# Altium PCB usbasp.PcbDoc (part 3 of 3)
Units mm, origin at the board's own origin, x right, y up, seen from the top; angles counter-clockwise.
Board outline 86.49 x 53.59 mm, 2 copper layers (Top Layer, Bottom Layer); 22 components, 22 nets, 89 pads, 22 vias.
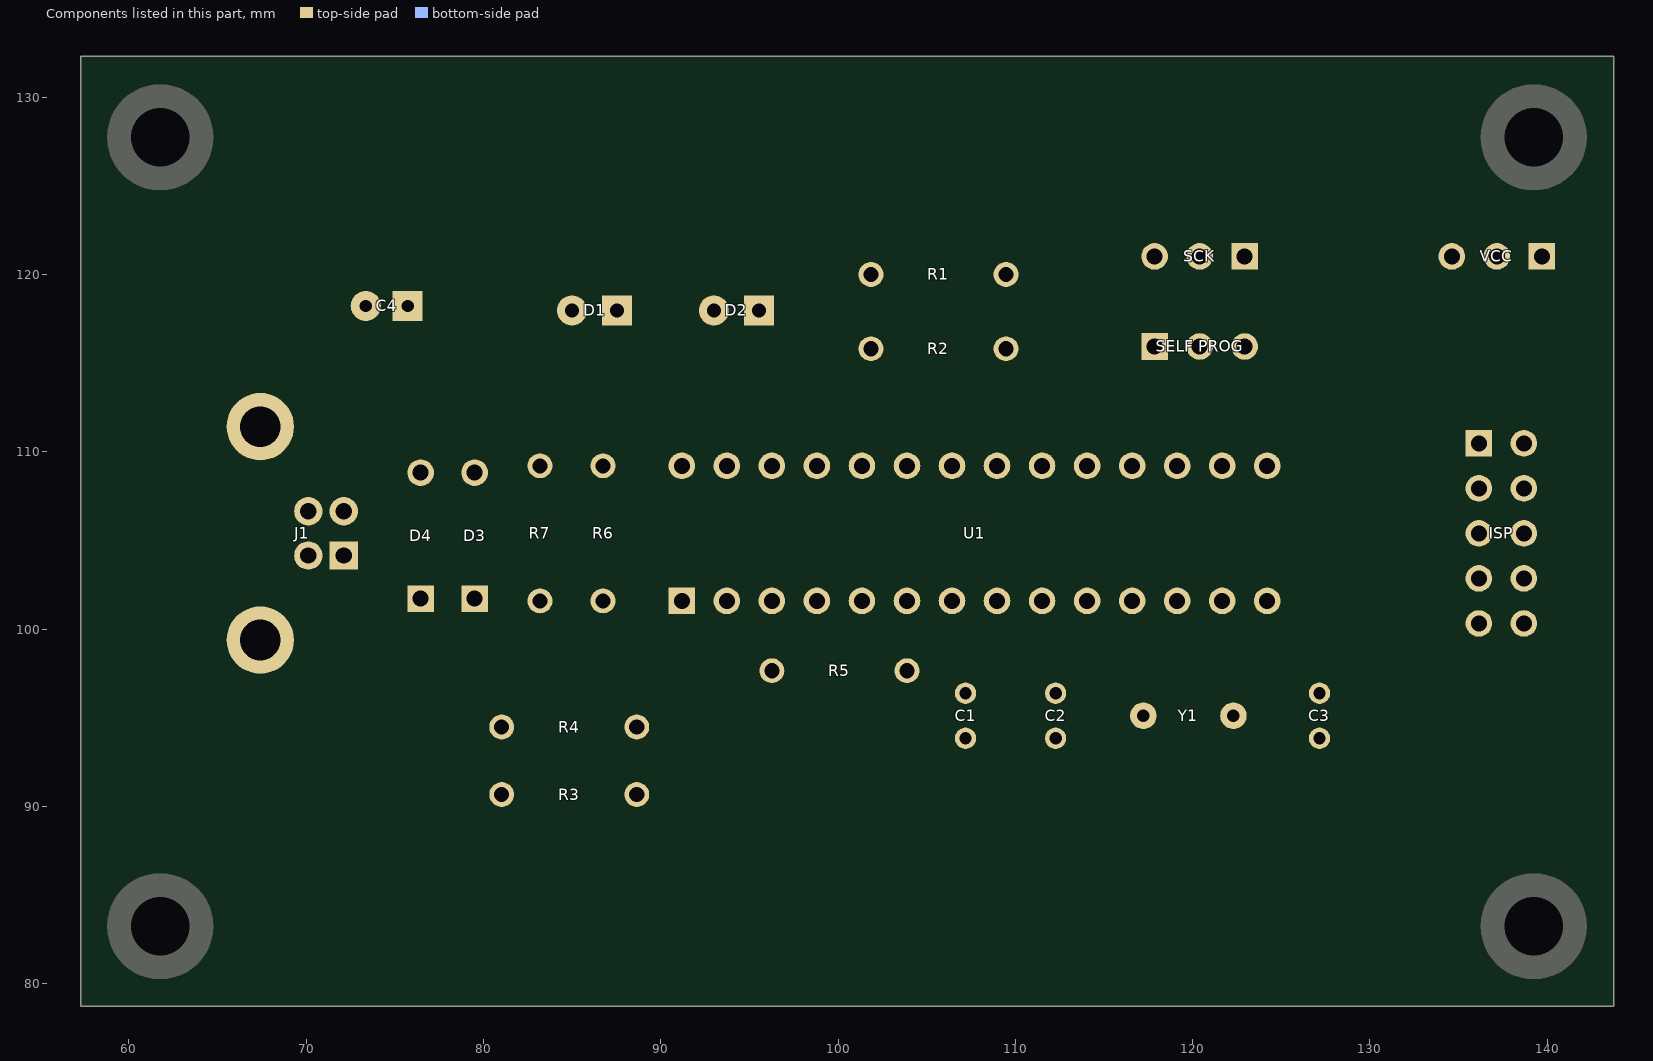
[diagram p3: the components of this part, seen from the top]

## Via types
v1: diameter 1.5, hole 0.711, Top Layer to Bottom Layer, tented top, 17 vias
v2: diameter 1.5, hole 0.711, Top Layer to Bottom Layer, 5 vias

## Nets (pads, with @x,y where several pads share a name; then routed paths per layer and width w, separated by ;. In a path a pad name is that pad's centre, name@x,y a point inside that pad or via, vN(x,y) a via of type N, cw(c..) or ccw(c..) an arc to the next point about the centre after c; other vN are vias at no path point) (continued)
copper on no net: (continued)
  Bottom Layer w0.01: 130.714,126.806 130.765,126.806 ; 130.724,121.07 131.126,121.07 ; 130.724,121.503 131.816,121.503 ; 130.724,121.513 131.826,121.513 ; 130.724,121.523 131.836,121.523 ; 130.724,121.533 131.836,121.533 ; 130.724,121.698 131.177,121.698 ; 130.724,121.709 131.177,121.709 ; 130.724,121.719 131.177,121.719 ; 130.724,124.067 131.867,124.067 ; 130.724,124.077 131.857,124.077 ; 130.724,124.623 131.27,124.623 ; 130.724,124.633 131.27,124.633 ; 130.734,121.544 131.846,121.544 ; 130.734,121.554 131.857,121.554 ; 130.734,121.564 131.857,121.564 ; 130.734,121.575 131.867,121.575 ; 130.734,121.585 131.877,121.585 ; 130.734,121.606 131.888,121.606 ; 130.734,121.626 131.898,121.626 ; 130.734,121.636 131.908,121.636 ; 130.734,121.647 131.908,121.647 ; 130.734,121.657 131.908,121.657 ; 130.734,121.667 131.919,121.667 ; 130.734,121.678 131.177,121.678 ; 130.734,121.688 131.177,121.688 ; 130.734,124.087 131.846,124.087 ; 130.734,124.098 131.836,124.098 ; 130.734,124.108 131.836,124.108 ; 130.734,124.602 131.27,124.602 ; 130.734,124.612 131.27,124.612 ; 130.745,121.595 131.877,121.595 ; 130.745,121.616 131.888,121.616 ; 130.745,124.118 131.826,124.118 ; 130.745,124.128 131.816,124.128 ; 130.745,124.139 131.805,124.139 ; 130.745,124.571 131.259,124.571 ; 130.745,124.582 131.27,124.582 ; 130.745,124.592 131.27,124.592 ; 130.755,124.149 131.795,124.149 ; 130.755,124.159 131.785,124.159 ; 130.755,124.17 131.774,124.17 ; 130.755,124.54 131.259,124.54 ; 130.755,124.551 131.259,124.551 ; 130.755,124.561 131.259,124.561 ; 130.765,122.429 130.775,122.429 ; 130.765,124.18 131.764,124.18 ; 130.765,124.19 131.754,124.19 ; 130.765,124.201 131.743,124.201 ; 130.765,124.211 131.733,124.211 ; 130.765,124.221 131.723,124.221 ; 130.765,124.479 131.239,124.479 ; 130.765,124.499 131.249,124.499 ; 130.765,124.509 131.249,124.509 ; 130.765,124.52 131.249,124.52 ; 130.765,124.53 131.249,124.53 ; 130.775,120.72 130.786,120.72 ; 130.775,124.231 131.702,124.231 ; 130.775,124.242 131.702,124.242 ; 130.775,124.252 131.682,124.252 ; 130.775,124.262 131.671,124.262 ; 130.775,124.273 131.651,124.273 ; 130.775,124.283 131.64,124.283 ; 130.775,124.304 131.61,124.304 ; 130.775,124.314 131.589,124.314 ; 130.775,124.355 131.517,124.355 ; 130.775,124.396 131.229,124.396 ; 130.775,124.417 131.218,124.417 ; 130.775,124.437 131.229,124.437 ; 130.775,124.448 131.229,124.448 ; 130.775,124.458 131.229,124.458 ; 130.775,124.468 131.239,124.468 ; 130.775,124.489 131.239,124.489 ; 130.775,126.806 130.971,126.806 ; 130.786,124.293 131.63,124.293 ; 130.786,124.324 131.579,124.324 ; 130.786,124.334 131.558,124.334 ; 130.786,124.345 131.537,124.345 ; 130.786,124.365 131.476,124.365 ; 130.786,124.376 131.445,124.376 ; 130.786,124.386 131.404,124.386 ; 130.786,124.407 131.218,124.407 ; 130.786,124.427 131.229,124.427 ; 130.806,121.06 130.827,121.06 ; 130.837,121.06 130.848,121.06 ; 130.858,120.72 130.868,120.72 ; 130.858,121.06 131.012,121.06 ; 130.868,123.995 130.878,123.995 ; 130.889,122.759 131.795,122.759 ; 130.899,120.72 130.909,120.72 ; 130.899,122.769 131.774,122.769 ; 130.899,122.779 131.764,122.779 ; 130.93,122.79 130.94,122.79 ; 130.951,120.72 130.961,120.72 ; 130.951,122.79 131.774,122.79 ; 130.981,126.806 131.053,126.806 ; 131.002,120.72 131.012,120.72 ; 131.023,121.06 131.043,121.06 ; 131.023,122.749 131.816,122.749 ; 131.023,123.995 131.033,123.995 ; 131.043,123.995 131.908,123.995 ; 131.053,121.06 131.064,121.06 ; 131.064,126.806 131.198,126.806 ; 131.074,122.8 131.785,122.8 ; 131.084,123.984 131.908,123.984 ; 131.105,122.738 131.836,122.738 ; 131.115,122.81 131.795,122.81 ; 131.126,123.974 131.919,123.974 ; 131.146,122.821 131.805,122.821 ; 131.156,122.728 131.857,122.728 ; 131.167,122.831 131.805,122.831 ; 131.167,123.964 131.929,123.964 ; 131.177,121.08 131.187,121.08 ; 131.187,123.953 131.929,123.953 ; 131.198,122.718 131.877,122.718 ; 131.198,122.841 131.826,122.841 ; 131.208,123.943 131.929,123.943 ; 131.208,126.806 131.373,126.806 ; 131.218,121.678 131.929,121.678 ; 131.218,122.707 131.888,122.707 ; 131.218,122.852 131.826,122.852 ; 131.229,122.862 131.836,122.862 ; 131.239,121.688 131.929,121.688 ; 131.239,122.697 131.908,122.697 ; 131.239,123.933 131.939,123.933 ; 131.239,124.396 131.249,124.396 ; 131.239,126.353 131.259,126.353 ; 131.249,121.698 131.939,121.698 ; 131.249,122.872 131.846,122.872 ; 131.249,123.923 131.939,123.923 ; 131.259,121.709 131.939,121.709 ; 131.259,122.687 131.919,122.687 ; 131.259,124.396 131.27,124.396 ; 131.27,121.719 131.949,121.719 ; 131.27,122.882 131.857,122.882 ; 131.27,123.912 131.949,123.912 ; 131.27,126.353 131.311,126.353 ; 131.28,122.676 131.929,122.676 ; 131.28,122.893 131.867,122.893 ; 131.28,123.902 131.949,123.902 ; 131.28,124.396 131.29,124.396 ; 131.29,121.729 131.949,121.729 ; 131.29,122.666 131.939,122.666 ; 131.29,122.903 131.877,122.903 ; 131.301,121.739 131.96,121.739 ; 131.301,122.656 131.949,122.656 ; 131.301,123.892 131.96,123.892 ; 131.311,121.75 131.96,121.75 ; 131.311,122.913 131.888,122.913 ; 131.311,123.881 131.96,123.881 ; 131.311,124.396 131.321,124.396 ; 131.321,121.76 131.97,121.76 ; 131.321,122.635 131.97,122.635 ; 131.321,122.646 131.96,122.646 ; 131.321,122.924 131.898,122.924 ; 131.321,126.353 131.342,126.353 ; 131.332,121.77 131.97,121.77 ; 131.332,122.625 131.98,122.625 ; 131.332,122.934 131.908,122.934 ; 131.332,123.871 131.96,123.871 ; 131.342,121.781 131.98,121.781 ; 131.342,122.944 131.908,122.944 ; 131.342,123.861 131.97,123.861 ; 131.352,121.791 131.98,121.791 ; 131.352,122.604 132.001,122.604 ; 131.352,122.615 131.991,122.615 ; 131.352,122.955 131.919,122.955 ; 131.352,123.85 131.97,123.85 ; 131.352,126.353 131.373,126.353 ; 131.362,120.72 131.373,120.72 ; 131.362,121.801 131.98,121.801 ; 131.362,122.965 131.929,122.965 ; 131.362,123.84 131.97,123.84 ; 131.373,121.811 131.991,121.811 ; 131.373,122.594 132.001,122.594 ; 131.373,122.975 131.929,122.975 ; 131.373,123.83 131.98,123.83 ; 131.383,121.822 131.991,121.822 ; 131.383,121.832 132.001,121.832 ; 131.383,122.584 132.011,122.584 ; 131.383,122.985 131.939,122.985 ; 131.383,123.82 131.98,123.82 ; 131.383,126.353 131.393,126.353 ; 131.383,126.806 131.424,126.806 ; 131.393,120.72 131.404,120.72 ; 131.393,121.842 132.001,121.842 ; 131.393,122.574 132.011,122.574 ; 131.393,122.996 131.949,122.996 ; 131.393,123.006 131.949,123.006 ; 131.393,123.809 131.991,123.809 ; 131.404,121.853 132.011,121.853 ; 131.404,122.563 132.021,122.563 ; 131.404,123.016 131.96,123.016 ; 131.404,123.799 131.991,123.799 ; 131.404,126.353 131.424,126.353 ; 131.414,121.863 132.011,121.863 ; 131.414,122.553 132.032,122.553 ; 131.414,123.027 131.96,123.027 ; 131.414,123.778 131.991,123.778 ; 131.414,123.789 131.991,123.789 ; 131.424,121.873 132.011,121.873 ; 131.424,121.884 132.021,121.884 ; 131.424,122.543 132.032,122.543 ; 131.424,123.037 131.97,123.037 ; 131.424,123.047 131.97,123.047 ; 131.424,123.768 131.991,123.768 ; 131.435,122.532 132.032,122.532 ; 131.435,123.058 131.98,123.058 ; 131.435,123.068 131.98,123.068 ; 131.435,123.758 132.001,123.758 ; 131.435,126.353 131.445,126.353 ; 131.435,126.806 131.589,126.806 ; 131.445,121.894 132.021,121.894 ; 131.445,121.904 132.021,121.904 ; 131.445,122.522 132.042,122.522 ; 131.445,123.078 131.98,123.078 ; 131.445,123.737 132.001,123.737 ; 131.445,123.747 132.001,123.747 ; 131.455,120.72 131.465,120.72 ; 131.455,121.914 132.032,121.914 ; 131.455,122.512 132.042,122.512 ; 131.455,123.088 131.991,123.088 ; 131.455,123.099 131.991,123.099 ; 131.455,123.727 132.011,123.727 ; 131.455,124.376 131.465,124.376 ; 131.455,126.353 131.476,126.353 ; 131.465,121.925 132.032,121.925 ; 131.465,121.935 132.042,121.935 ; 131.465,122.501 132.052,122.501 ; 131.465,123.109 131.991,123.109 ; 131.465,123.119 132.001,123.119 ; 131.465,123.696 132.011,123.696 ; 131.465,123.706 132.011,123.706 ; 131.465,123.717 132.011,123.717 ; 131.476,121.945 132.042,121.945 ; 131.476,121.956 132.042,121.956 ; 131.476,122.491 132.052,122.491 ; 131.476,123.13 132.001,123.13 ; 131.476,123.14 132.001,123.14 ; 131.476,123.686 132.011,123.686 ; 131.486,121.966 132.052,121.966 ; 131.486,121.976 132.052,121.976 ; 131.486,122.471 132.052,122.471 ; 131.486,122.481 132.052,122.481 ; 131.486,123.15 132.011,123.15 ; 131.486,123.16 132.011,123.16 ; 131.486,123.171 132.011,123.171 ; 131.486,123.665 132.011,123.665 ; 131.486,123.675 132.021,123.675 ; 131.486,124.365 131.496,124.365 ; 131.486,126.353 131.517,126.353 ; 131.496,120.72 131.507,120.72 ; 131.496,121.987 132.052,121.987 ; 131.496,121.997 132.063,121.997 ; 131.496,122.46 132.063,122.46 ; 131.496,123.181 132.011,123.181 ; 131.496,123.191 132.021,123.191 ; 131.496,123.634 132.021,123.634 ; 131.496,123.644 132.021,123.644 ; 131.496,123.655 132.021,123.655 ; 131.507,122.007 132.063,122.007 ; 131.507,122.017 132.063,122.017 ; 131.507,122.44 132.063,122.44 ; 131.507,122.45 132.063,122.45 ; 131.507,123.202 132.021,123.202 ; 131.507,123.212 132.032,123.212 ; 131.507,123.222 132.021,123.222 ; 131.507,123.233 132.032,123.233 ; 131.507,123.603 132.032,123.603 ; 131.507,123.614 132.021,123.614 ; 131.507,123.624 132.032,123.624 ; 131.517,122.028 132.063,122.028 ; 131.517,122.038 132.073,122.038 ; 131.517,122.429 132.063,122.429 ; 131.517,123.243 132.032,123.243 ; 131.517,123.253 132.032,123.253 ; 131.517,123.263 132.032,123.263 ; 131.517,123.274 132.032,123.274 ; 131.517,123.562 132.032,123.562 ; 131.517,123.572 132.032,123.572 ; 131.517,123.583 132.032,123.583 ; 131.517,123.593 132.032,123.593 ; 131.527,122.048 132.073,122.048 ; 131.527,122.059 132.073,122.059 ; 131.527,122.069 132.083,122.069 ; 131.527,122.079 132.083,122.079 ; 131.527,122.409 132.073,122.409 ; 131.527,122.419 132.073,122.419 ; 131.527,123.284 132.042,123.284 ; 131.527,123.294 132.032,123.294 ; 131.527,123.305 132.042,123.305 ; 131.527,123.315 132.042,123.315 ; 131.527,123.325 132.042,123.325 ; 131.527,123.336 132.042,123.336 ; 131.527,123.48 132.042,123.48 ; 131.527,123.5 132.042,123.5 ; 131.527,123.521 132.042,123.521 ; 131.527,123.531 132.042,123.531 ; 131.527,123.542 132.032,123.542 ; 131.527,123.552 132.032,123.552 ; 131.527,126.353 131.537,126.353 ; 131.537,122.09 132.083,122.09 ; 131.537,122.1 132.083,122.1 ; 131.537,122.11 132.083,122.11 ; 131.537,122.12 132.094,122.12 ; 131.537,122.388 132.073,122.388 ; 131.537,122.398 132.073,122.398 ; 131.537,123.346 132.042,123.346 ; 131.537,123.356 132.042,123.356 ; 131.537,123.366 132.042,123.366 ; 131.537,123.377 132.042,123.377 ; 131.537,123.387 132.042,123.387 ; 131.537,123.397 132.042,123.397 ; 131.537,123.408 132.042,123.408 ; 131.537,123.418 132.042,123.418 ; 131.537,123.428 132.042,123.428 ; 131.537,123.439 132.042,123.439 ; 131.537,123.449 132.042,123.449 ; 131.537,123.459 132.042,123.459 ; 131.537,123.469 132.042,123.469 ; 131.537,123.49 132.042,123.49 ; 131.537,123.511 132.032,123.511 ; 131.548,122.131 132.083,122.131 ; 131.548,122.141 132.094,122.141 ; 131.548,122.151 132.094,122.151 ; 131.548,122.172 132.094,122.172 ; 131.548,122.347 132.083,122.347 ; 131.548,122.357 132.083,122.357 ; 131.548,122.368 132.083,122.368 ; 131.548,122.378 132.073,122.378 ; 131.548,126.353 131.568,126.353 ; 131.558,120.72 131.568,120.72 ; 131.558,122.162 132.094,122.162 ; 131.558,122.182 132.083,122.182 ; 131.558,122.193 132.094,122.193 ; 131.558,122.203 132.094,122.203 ; 131.558,122.213 132.094,122.213 ; 131.558,122.223 132.083,122.223 ; 131.558,122.234 132.094,122.234 ; 131.558,122.244 132.094,122.244 ; 131.558,122.254 132.094,122.254 ; 131.558,122.275 132.094,122.275 ; 131.558,122.285 132.083,122.285 ; 131.558,122.295 132.094,122.295 ; 131.558,122.306 132.083,122.306 ; 131.558,122.316 132.083,122.316 ; 131.558,122.326 132.083,122.326 ; 131.558,122.337 132.083,122.337 ; 131.568,122.265 132.094,122.265 ; 131.579,126.353 131.61,126.353 ; 131.599,120.72 131.61,120.72 ; 131.599,126.806 131.877,126.806 ; 131.62,126.353 131.64,126.353 ; 131.64,120.72 131.651,120.72 ; 131.651,126.353 131.661,126.353 ; 131.671,120.72 131.682,120.72 ; 131.682,126.353 131.692,126.353 ; 131.702,126.353 131.713,126.353 ; 131.723,126.353 131.733,126.353 ; 131.733,120.72 131.743,120.72 ; 131.743,126.353 131.754,126.353 ; 131.764,120.72 131.774,120.72 ; 131.764,126.353 131.774,126.353 ; 131.795,120.72 131.805,120.72 ; 131.795,126.353 131.805,126.353 ; 131.826,126.353 131.836,126.353 ; 131.857,126.353 131.867,126.353 ; 131.888,126.353 131.898,126.353 ; 131.888,126.806 131.96,126.806 ; 131.919,126.353 131.929,126.353 ; 131.949,126.353 131.96,126.353 ; 131.97,126.806 132.351,126.806 ; 131.98,126.353 131.991,126.353 ; 132.001,126.353 132.021,126.353 ; 132.032,126.353 132.073,126.353 ; 132.083,126.353 132.124,126.353 ; 132.135,126.353 132.166,126.353 ; 132.176,126.353 132.186,126.353 ; 132.197,126.353 132.217,126.353 ; 132.227,126.353 132.856,126.353 ; 132.31,120.72 132.32,120.72 ; 132.341,120.72 132.361,120.72 ; 132.361,126.806 132.526,126.806 ; 132.372,120.72 132.856,120.72 ; 132.372,120.73 132.856,120.73 ; 132.372,120.741 132.845,120.741 ; 132.372,120.751 132.856,120.751 ; 132.372,120.761 132.856,120.761 ; 132.372,120.771 132.856,120.771 ; 132.372,120.782 132.856,120.782 ; 132.372,120.792 132.856,120.792 ; 132.372,120.802 132.856,120.802 ; 132.372,120.813 132.845,120.813 ; 132.372,120.823 132.856,120.823 ; 132.372,120.833 132.856,120.833 ; 132.372,120.844 132.856,120.844 ; 132.372,120.854 132.856,120.854 ; 132.372,120.864 132.856,120.864 ; 132.372,120.874 132.856,120.874 ; 132.372,120.885 132.856,120.885 ; 132.372,120.895 132.856,120.895 ; 132.372,120.905 132.845,120.905 ; 132.372,120.916 132.856,120.916 ; 132.372,120.926 132.856,120.926 ; 132.372,120.936 132.856,120.936 ; 132.372,120.946 132.856,120.946 ; 132.372,120.957 132.856,120.957 ; 132.372,120.967 132.856,120.967 ; 132.372,120.977 132.845,120.977 ; 132.372,120.988 132.856,120.988 ; 132.372,120.998 132.856,120.998 ; 132.372,121.008 132.856,121.008 ; 132.372,121.019 132.856,121.019 ; 132.372,121.029 132.856,121.029 ; 132.372,121.039 132.856,121.039 ; 132.372,121.049 132.856,121.049 ; 132.372,121.06 132.845,121.06 ; 132.372,121.07 132.856,121.07 ; 132.372,121.08 132.856,121.08 ; 132.372,121.091 132.856,121.091 ; 132.372,121.101 132.856,121.101 ; 132.372,121.111 132.856,121.111 ; 132.372,121.122 132.856,121.122 ; 132.372,121.132 132.856,121.132 ; 132.372,121.142 132.845,121.142 ; 132.372,121.152 132.856,121.152 ; 132.372,121.163 132.856,121.163 ; 132.372,121.173 132.856,121.173 ; 132.372,121.183 132.856,121.183 ; 132.372,121.194 132.856,121.194 ; 132.372,121.204 132.856,121.204 ; 132.372,121.214 132.856,121.214 ; 132.372,121.225 132.856,121.225 ; 132.372,121.235 132.845,121.235 ; 132.372,121.245 132.856,121.245 ; 132.372,121.255 132.856,121.255 ; 132.372,121.266 132.856,121.266 ; 132.372,121.276 132.856,121.276 ; 132.372,121.286 132.856,121.286 ; 132.372,121.297 132.856,121.297 ; 132.372,121.307 132.845,121.307 ; 132.372,121.317 132.856,121.317 ; 132.372,121.327 132.856,121.327 ; 132.372,121.338 132.856,121.338 ; 132.372,121.348 132.856,121.348 ; 132.372,121.358 132.856,121.358 ; 132.372,121.369 132.856,121.369 ; 132.372,121.379 132.856,121.379 ; 132.372,121.389 132.856,121.389 ; 132.372,121.4 132.845,121.4 ; 132.372,121.41 132.856,121.41 ; 132.372,121.42 132.856,121.42 ; 132.372,121.43 132.856,121.43 ; 132.372,121.441 132.856,121.441 ; 132.372,121.451 132.856,121.451 ; 132.372,121.461 132.856,121.461 ; 132.372,121.472 132.856,121.472 ; 132.372,121.482 132.856,121.482 ; 132.372,121.492 132.856,121.492 ; 132.372,121.503 132.856,121.503 ; 132.372,121.513 132.856,121.513 ; 132.372,121.523 132.856,121.523 ; 132.372,121.533 132.845,121.533 ; 132.372,121.544 132.856,121.544 ; 132.372,121.554 132.856,121.554 ; 132.372,121.564 132.856,121.564 ; 132.372,121.575 132.856,121.575 ; 132.372,121.585 132.856,121.585 ; 132.372,121.595 132.856,121.595 ; 132.372,121.606 132.856,121.606 ; 132.372,121.616 132.856,121.616 ; 132.372,121.626 132.856,121.626 ; 132.372,121.636 132.856,121.636 ; 132.372,121.647 132.856,121.647 ; 132.372,121.657 132.856,121.657 ; 132.372,121.667 132.856,121.667 ; 132.372,121.678 132.845,121.678 ; 132.372,121.688 132.856,121.688 ; 132.372,121.698 132.856,121.698 ; 132.372,121.709 132.856,121.709 ; 132.372,121.719 132.856,121.719 ; 132.372,121.729 132.856,121.729 ; 132.372,121.739 132.856,121.739 ; 132.372,121.75 132.856,121.75 ; 132.372,121.76 132.856,121.76 ; 132.372,121.77 132.856,121.77 ; 132.372,121.781 132.845,121.781 ; 132.372,121.791 132.856,121.791 ; 132.372,121.801 132.856,121.801 ; 132.372,121.811 132.856,121.811 ; 132.372,121.822 132.856,121.822 ; 132.372,121.832 132.856,121.832 ; 132.372,121.842 132.856,121.842 ; 132.372,121.853 132.856,121.853 ; 132.372,121.863 132.856,121.863 ; 132.372,121.873 132.856,121.873 ; 132.372,121.884 132.845,121.884 ; 132.372,121.894 132.856,121.894 ; 132.372,121.904 132.856,121.904 ; 132.372,121.914 132.856,121.914 ; 132.372,121.925 132.856,121.925 ; 132.372,121.935 132.856,121.935 ; 132.372,121.945 132.856,121.945 ; 132.372,121.956 132.856,121.956 ; 132.372,121.966 132.856,121.966 ; 132.372,121.976 132.856,121.976 ; 132.372,121.987 132.845,121.987 ; 132.372,121.997 132.856,121.997 ; 132.372,122.007 132.856,122.007 ; 132.372,122.017 132.856,122.017 ; 132.372,122.028 132.856,122.028 ; 132.372,122.038 132.856,122.038 ; 132.372,122.048 132.856,122.048 ; 132.372,122.059 132.856,122.059 ; 132.372,122.069 132.856,122.069 ; 132.372,122.079 132.856,122.079 ; 132.372,122.09 132.856,122.09 ; 132.372,122.1 132.845,122.1 ; 132.372,122.11 132.856,122.11 ; 132.372,122.12 132.856,122.12 ; 132.372,122.131 132.856,122.131 ; 132.372,122.141 132.856,122.141 ; 132.372,122.151 132.856,122.151 ; 132.372,122.162 132.856,122.162 ; 132.372,122.172 132.856,122.172 ; 132.372,122.182 132.845,122.182 ; 132.372,122.193 132.856,122.193 ; 132.372,122.203 132.856,122.203 ; 132.372,122.213 132.856,122.213 ; 132.372,122.223 132.856,122.223 ; 132.372,122.234 132.856,122.234 ; 132.372,122.244 132.856,122.244 ; 132.372,122.254 132.856,122.254 ; 132.372,122.265 132.856,122.265 ; 132.372,122.275 132.856,122.275 ; 132.372,122.285 132.856,122.285 ; 132.372,122.295 132.845,122.295 ; 132.372,122.306 132.856,122.306 ; 132.372,122.316 132.856,122.316 ; 132.372,122.326 132.856,122.326 ; 132.372,122.337 132.845,122.337 ; 132.372,122.347 132.856,122.347 ; 132.372,122.357 132.856,122.357 ; 132.372,122.368 132.856,122.368 ; 132.372,122.378 132.856,122.378 ; 132.372,122.388 132.856,122.388 ; 132.372,122.398 132.856,122.398 ; 132.372,122.409 132.856,122.409 ; 132.372,122.419 132.856,122.419 ; 132.372,122.429 132.856,122.429 ; 132.372,122.44 132.856,122.44 ; 132.372,122.45 132.856,122.45 ; 132.372,122.46 132.856,122.46 ; 132.372,122.471 132.845,122.471 ; 132.372,122.481 132.856,122.481 ; 132.372,122.491 132.856,122.491 ; 132.372,122.501 132.856,122.501 ; 132.372,122.512 132.856,122.512 ; 132.372,122.522 132.856,122.522 ; 132.372,122.532 132.856,122.532 ; 132.372,122.543 132.856,122.543 ; 132.372,122.553 132.845,122.553 ; 132.372,122.563 132.856,122.563 ; 132.372,122.574 132.856,122.574 ; 132.372,122.584 132.856,122.584 ; 132.372,122.594 132.856,122.594 ; 132.372,122.604 132.856,122.604 ; 132.372,122.615 132.856,122.615 ; 132.372,122.625 132.856,122.625 ; 132.372,122.635 132.856,122.635 ; 132.372,122.646 132.856,122.646 ; 132.372,122.656 132.856,122.656 ; 132.372,122.666 132.856,122.666 ; 132.372,122.676 132.845,122.676 ; 132.372,122.687 132.856,122.687 ; 132.372,122.697 132.856,122.697 ; 132.372,122.707 132.856,122.707 ; 132.372,122.718 132.856,122.718 ; 132.372,122.728 132.856,122.728 ; 132.372,122.738 132.856,122.738 ; 132.372,122.749 132.856,122.749 ; 132.372,122.759 132.856,122.759 ; 132.372,122.769 132.856,122.769 ; 132.372,122.779 132.856,122.779 ; 132.372,122.79 132.856,122.79 ; 132.372,122.8 132.856,122.8 ; 132.372,122.81 132.856,122.81 ; 132.372,122.821 132.856,122.821 ; 132.372,122.831 132.856,122.831 ; 132.372,122.841 132.845,122.841 ; 132.372,122.852 132.856,122.852 ; 132.372,122.862 132.856,122.862 ; 132.372,122.872 132.856,122.872 ; 132.372,122.882 132.856,122.882 ; 132.372,122.893 132.856,122.893 ; 132.372,122.903 132.856,122.903 ; 132.372,122.913 132.845,122.913 ; 132.372,122.924 132.856,122.924 ; 132.372,122.934 132.856,122.934 ; 132.372,122.944 132.856,122.944 ; 132.372,122.955 132.856,122.955 ; 132.372,122.965 132.856,122.965 ; 132.372,122.975 132.856,122.975 ; 132.372,122.985 132.856,122.985 ; 132.372,122.996 132.856,122.996 ; 132.372,123.006 132.845,123.006 ; 132.372,123.016 132.856,123.016 ; 132.372,123.027 132.856,123.027 ; 132.372,123.037 132.856,123.037 ; 132.372,123.047 132.856,123.047 ; 132.372,123.058 132.856,123.058 ; 132.372,123.068 132.856,123.068 ; 132.372,123.078 132.856,123.078 ; 132.372,123.088 132.845,123.088 ; 132.372,123.099 132.856,123.099 ; 132.372,123.109 132.856,123.109 ; 132.372,123.119 132.856,123.119 ; 132.372,123.13 132.856,123.13 ; 132.372,123.14 132.856,123.14 ; 132.372,123.15 132.856,123.15 ; 132.372,123.16 132.856,123.16 ; 132.372,123.171 132.845,123.171 ; 132.372,123.181 132.856,123.181 ; 132.372,123.191 132.856,123.191 ; 132.372,123.202 132.856,123.202 ; 132.372,123.212 132.856,123.212 ; 132.372,123.222 132.856,123.222 ; 132.372,123.233 132.856,123.233 ; 132.372,123.243 132.856,123.243 ; 132.372,123.253 132.856,123.253 ; 132.372,123.263 132.856,123.263 ; 132.372,123.274 132.856,123.274 ; 132.372,123.284 132.856,123.284 ; 132.372,123.294 132.845,123.294 ; 132.372,123.305 132.856,123.305 ; 132.372,123.315 132.856,123.315 ; 132.372,123.325 132.856,123.325 ; 132.372,123.336 132.856,123.336 ; 132.372,123.346 132.856,123.346 ; 132.372,123.356 132.856,123.356 ; 132.372,123.366 132.856,123.366 ; 132.372,123.377 132.845,123.377 ; 132.372,123.387 132.856,123.387 ; 132.372,123.397 132.856,123.397 ; 132.372,123.408 132.856,123.408 ; 132.372,123.418 132.856,123.418 ; 132.372,123.428 132.856,123.428 ; 132.372,123.439 132.856,123.439 ; 132.372,123.449 132.856,123.449 ; 132.372,123.459 132.845,123.459 ; 132.372,123.469 132.856,123.469 ; 132.372,123.48 132.856,123.48 ; 132.372,123.49 132.856,123.49 ; 132.372,123.5 132.856,123.5 ; 132.372,123.511 132.856,123.511 ; 132.372,123.521 132.856,123.521 ; 132.372,123.531 132.856,123.531 ; 132.372,123.542 132.845,123.542 ; 132.372,123.552 132.856,123.552 ; 132.372,123.562 132.856,123.562 ; 132.372,123.572 132.856,123.572 ; 132.372,123.583 132.856,123.583 ; 132.372,123.593 132.856,123.593 ; 132.372,123.603 132.856,123.603 ; 132.372,123.614 132.856,123.614 ; 132.372,123.624 132.856,123.624 ; 132.372,123.634 132.856,123.634 ; 132.372,123.644 132.856,123.644 ; 132.372,123.655 132.856,123.655 ; 132.372,123.665 132.856,123.665 ; 132.372,123.675 132.856,123.675 ; 132.372,123.686 132.856,123.686 ; 132.372,123.696 132.856,123.696 ; 132.372,123.706 132.845,123.706 ; 132.372,123.717 132.856,123.717 ; 132.372,123.727 132.856,123.727 ; 132.372,123.737 132.856,123.737 ; 132.372,123.747 132.856,123.747 ; 132.372,123.758 132.856,123.758 ; 132.372,123.768 132.856,123.768 ; 132.372,123.778 132.856,123.778 ; 132.372,123.789 132.845,123.789 ; 132.372,123.799 132.856,123.799 ; 132.372,123.809 132.856,123.809 ; 132.372,123.82 132.856,123.82 ; 132.372,123.83 132.856,123.83 ; 132.372,123.84 132.856,123.84 ; 132.372,123.85 132.856,123.85 ; 132.372,123.861 132.856,123.861 ; 132.372,123.871 132.845,123.871 ; 132.372,123.881 132.856,123.881 ; 132.372,123.892 132.856,123.892 ; 132.372,123.902 132.856,123.902 ; 132.372,123.912 132.856,123.912 ; 132.372,123.923 132.856,123.923 ; 132.372,123.933 132.856,123.933 ; 132.372,123.943 132.856,123.943 ; 132.372,123.953 132.845,123.953 ; 132.372,123.964 132.856,123.964 ; 132.372,123.974 132.856,123.974 ; 132.372,123.984 132.856,123.984 ; 132.372,123.995 132.856,123.995 ; 132.372,124.005 132.856,124.005 ; 132.372,124.015 132.856,124.015 ; 132.372,124.025 132.856,124.025 ; 132.372,124.036 132.856,124.036 ; 132.372,124.046 132.856,124.046 ; 132.372,124.056 132.856,124.056 ; 132.372,124.067 132.856,124.067 ; 132.372,124.077 132.845,124.077 ; 132.372,124.087 132.856,124.087 ; 132.372,124.098 132.856,124.098 ; 132.372,124.108 132.856,124.108 ; 132.372,124.118 132.856,124.118 ; 132.372,124.128 132.856,124.128 ; 132.372,124.139 132.856,124.139 ; 132.372,124.149 132.856,124.149 ; 132.372,124.159 132.856,124.159 ; 132.372,124.17 132.856,124.17 ; 132.372,124.18 132.856,124.18 ; 132.372,124.19 132.856,124.19 ; 132.372,124.201 132.845,124.201 ; 132.372,124.211 132.856,124.211 ; 132.372,124.221 132.856,124.221 ; 132.372,124.231 132.856,124.231 ; 132.372,124.242 132.856,124.242 ; 132.372,124.252 132.856,124.252 ; 132.372,124.262 132.856,124.262 ; 132.372,124.273 132.845,124.273 ; 132.372,124.283 132.856,124.283 ; 132.372,124.293 132.856,124.293 ; 132.372,124.304 132.856,124.304 ; 132.372,124.314 132.845,124.314 ; 132.372,124.324 132.856,124.324 ; 132.372,124.334 132.856,124.334 ; 132.372,124.345 132.856,124.345 ; 132.372,124.355 132.856,124.355 ; 132.372,124.365 132.856,124.365 ; 132.372,124.376 132.856,124.376 ; 132.372,124.386 132.856,124.386 ; 132.372,124.396 132.845,124.396 ; 132.372,124.407 132.856,124.407 ; 132.372,124.417 132.856,124.417 ; 132.372,124.427 132.856,124.427 ; 132.372,124.437 132.856,124.437 ; 132.372,124.448 132.845,124.448 ; 132.372,124.458 132.856,124.458 ; 132.372,124.468 132.856,124.468 ; 132.372,124.479 132.856,124.479 ; 132.372,124.489 132.856,124.489 ; 132.372,124.499 132.856,124.499 ; 132.372,124.509 132.856,124.509 ; 132.372,124.52 132.856,124.52 ; 132.372,124.53 132.856,124.53 ; 132.372,124.54 132.845,124.54 ; 132.372,124.551 132.856,124.551 ; 132.372,124.561 132.856,124.561 ; 132.372,124.571 132.856,124.571 ; 132.372,124.582 132.856,124.582 ; 132.372,124.592 132.856,124.592 ; 132.372,124.602 132.856,124.602 ; 132.372,124.612 132.845,124.612 ; 132.372,124.623 132.856,124.623 ; 132.372,124.633 132.856,124.633 ; 132.372,124.643 132.856,124.643 ; 132.372,124.654 132.856,124.654 ; 132.372,124.664 132.856,124.664 ; 132.372,124.674 132.856,124.674 ; 132.372,124.685 132.856,124.685 ; 132.372,124.695 132.845,124.695 ; 132.372,124.705 132.856,124.705 ; 132.372,124.715 132.856,124.715 ; 132.372,124.726 132.856,124.726 ; 132.372,124.736 132.856,124.736 ; 132.372,124.746 132.856,124.746 ; 132.372,124.757 132.856,124.757 ; 132.372,124.767 132.856,124.767 ; 132.372,124.777 132.845,124.777 ; 132.372,124.788 132.856,124.788 ; 132.372,124.798 132.856,124.798 ; 132.372,124.808 132.856,124.808 ; 132.372,124.818 132.845,124.818 ; 132.372,124.829 132.856,124.829 ; 132.372,124.839 132.856,124.839 ; 132.372,124.849 132.856,124.849 ; 132.372,124.86 132.856,124.86 ; 132.372,124.87 132.856,124.87 ; 132.372,124.88 132.856,124.88 ; 132.372,124.89 132.856,124.89 ; 132.372,124.901 132.845,124.901 ; 132.372,124.911 132.856,124.911 ; 132.372,124.921 132.856,124.921 ; 132.372,124.932 132.856,124.932 ; 132.372,124.942 132.856,124.942 ; 132.372,124.952 132.856,124.952 ; 132.372,124.963 132.856,124.963 ; 132.372,124.973 132.845,124.973 ; 132.372,124.983 132.856,124.983 ; 132.372,124.993 132.856,124.993 ; 132.372,125.004 132.856,125.004 ; 132.372,125.014 132.856,125.014 ; 132.372,125.024 132.845,125.024 ; 132.372,125.035 132.856,125.035 ; 132.372,125.045 132.856,125.045 ; 132.372,125.055 132.856,125.055 ; 132.372,125.066 132.845,125.066 ; 132.372,125.076 132.856,125.076 ; 132.372,125.086 132.856,125.086 ; 132.372,125.096 132.845,125.096 ; 132.372,125.107 132.856,125.107 ; 132.372,125.117 132.856,125.117 ; 132.372,125.127 132.856,125.127 ; 132.372,125.138 132.856,125.138 ; 132.372,125.148 132.856,125.148 ; 132.372,125.158 132.856,125.158 ; 132.372,125.169 132.856,125.169 ; 132.372,125.179 132.845,125.179 ; 132.372,125.189 132.856,125.189 ; 132.372,125.199 132.856,125.199 ; 132.372,125.21 132.856,125.21 ; 132.372,125.22 132.845,125.22 ; 132.372,125.23 132.856,125.23 ; 132.372,125.241 132.856,125.241 ; 132.372,125.251 132.856,125.251 ; 132.372,125.261 132.845,125.261 ; 132.372,125.272 132.856,125.272 ; 132.372,125.282 132.856,125.282 ; 132.372,125.292 132.856,125.292 ; 132.372,125.302 132.845,125.302 ; 132.372,125.313 132.856,125.313 ; 132.372,125.323 132.856,125.323 ; 132.372,125.333 132.856,125.333 ; 132.372,125.344 132.856,125.344 ; 132.372,125.354 132.856,125.354 ; 132.372,125.364 132.845,125.364 ; 132.372,125.374 132.856,125.374 ; 132.372,125.385 132.856,125.385 ; 132.372,125.395 132.856,125.395 ; 132.372,125.405 132.856,125.405 ; 132.372,125.416 132.856,125.416 ; 132.372,125.426 132.856,125.426 ; 132.372,125.436 132.845,125.436 ; 132.372,125.447 132.856,125.447 ; 132.372,125.457 132.856,125.457 ; 132.372,125.467 132.856,125.467 ; 132.372,125.477 132.845,125.477 ; 132.372,125.488 132.856,125.488 ; 132.372,125.498 132.856,125.498 ; 132.372,125.508 132.856,125.508 ; 132.372,125.519 132.845,125.519 ; 132.372,125.529 132.856,125.529 ; 132.372,125.539 132.856,125.539 ; 132.372,125.55 132.845,125.55 ; 132.372,125.56 132.856,125.56 ; 132.372,125.57 132.856,125.57 ; 132.372,125.58 132.856,125.58 ; 132.372,125.591 132.856,125.591 ; 132.372,125.601 132.856,125.601 ; 132.372,125.611 132.845,125.611 ; 132.372,125.622 132.856,125.622 ; 132.372,125.632 132.845,125.632 ; 132.372,125.642 132.856,125.642 ; 132.372,125.653 132.856,125.653 ; 132.372,125.663 132.856,125.663 ; 132.372,125.673 132.856,125.673 ; 132.372,125.683 132.845,125.683 ; 132.372,125.694 132.856,125.694 ; 132.372,125.704 132.856,125.704 ; 132.372,125.714 132.845,125.714 ; 132.372,125.725 132.856,125.725 ; 132.372,125.735 132.856,125.735 ; 132.372,125.745 132.856,125.745 ; 132.372,125.756 132.856,125.756 ; 132.372,125.766 132.845,125.766 ; 132.372,125.776 132.856,125.776 ; 132.372,125.786 132.856,125.786 ; 132.372,125.797 132.856,125.797 ; 132.372,125.807 132.845,125.807 ; 132.372,125.817 132.856,125.817 ; 132.372,125.828 132.856,125.828 ; 132.372,125.838 132.856,125.838 ; 132.372,125.848 132.845,125.848 ; 132.372,125.858 132.856,125.858 ; 132.372,125.869 132.856,125.869 ; 132.372,125.879 132.856,125.879 ; 132.372,125.889 132.845,125.889 ; 132.372,125.9 132.856,125.9 ; 132.372,125.91 132.856,125.91 ; 132.372,125.92 132.856,125.92 ; 132.372,125.931 132.845,125.931 ; 132.372,125.941 132.856,125.941 ; 132.372,125.951 132.856,125.951 ; 132.372,125.961 132.856,125.961 ; 132.372,125.972 132.845,125.972 ; 132.372,125.982 132.856,125.982 ; 132.372,125.992 132.856,125.992 ; 132.372,126.003 132.856,126.003 ; 132.372,126.013 132.845,126.013 ; 132.372,126.023 132.856,126.023 ; 132.372,126.034 132.856,126.034 ; 132.372,126.044 132.845,126.044 ; 132.372,126.054 132.856,126.054 ; 132.372,126.064 132.856,126.064 ; 132.372,126.075 132.856,126.075 ; 132.372,126.085 132.856,126.085 ; 132.372,126.095 132.845,126.095 ; 132.372,126.106 132.856,126.106 ; 132.372,126.116 132.856,126.116 ; 132.372,126.126 132.845,126.126 ; 132.372,126.137 132.856,126.137 ; 132.372,126.147 132.856,126.147 ; 132.372,126.157 132.856,126.157 ; 132.372,126.167 132.856,126.167 ; 132.372,126.178 132.845,126.178 ; 132.372,126.188 132.856,126.188 ; 132.372,126.198 132.856,126.198 ; 132.372,126.209 132.856,126.209 ; 132.372,126.219 132.845,126.219 ; 132.372,126.229 132.856,126.229 ; 132.372,126.239 132.856,126.239 ; 132.372,126.25 132.845,126.25 ; 132.372,126.26 132.856,126.26 ; 132.372,126.27 132.856,126.27 ; 132.372,126.281 132.856,126.281 ; 132.372,126.291 132.856,126.291 ; 132.372,126.301 132.845,126.301 ; 132.372,126.312 132.856,126.312 ; 132.372,126.322 132.856,126.322 ; 132.372,126.332 132.856,126.332 ; 132.372,126.342 132.845,126.342 ; 132.536,126.806 132.608,126.806 ; 132.619,126.806 132.753,126.806 ; 132.763,126.806 132.845,126.806

## Keep-outs
Keep-Out Layer:
  the board outline again, w0.3

## Other copper
Bottom Layer:
  region: 74.302,89.858 72.847,91.313 67.393,91.313 68.847,89.858
  region: 74.301,89.449 cw(c72.21,89.449) 70.119,89.449 71.573,89.449 ccw(c72.21,89.449) 72.846,89.449
  region: 67.394,91.722 cw(c69.485,91.722) 71.576,91.722 70.121,91.722 ccw(c69.485,91.722) 68.848,91.722
  text "[ uzra.ir ]" at 81.534,129.286 h3.2
  text "University of Zanjan Robotics Association" at 131.318,129.286 h3.1
  text "USBasp v1.4" at 61.214,115.824 h3.5 r90
  text "1393 Bahman 22" at 126.619,85.471 h2.9
  text "[ mp.tabin.ir ]" at 87.63,80.518 h3
  text "Designed By: Meysam Parvizi" at 128.524,80.518 h3.5

## Silkscreen, mask and mechanical layers (free items; w line width, h text height)
Top Overlay:
  text "FAST" at 119.253,123.317 h1.52 r90
  text "SLOW" at 122.555,123.063 h1.52 r90